# Altium PCB thymio2-main.PcbDoc (part 4 of 4)
Units mm, origin at the board's own origin, x right, y up, seen from the top; angles counter-clockwise.
Board outline 107 x 105.75 mm, 2 copper layers (Top Layer, Bottom Layer), stack 1.591 mm thick; 334 components, 247 nets, 987 pads, 487 vias.
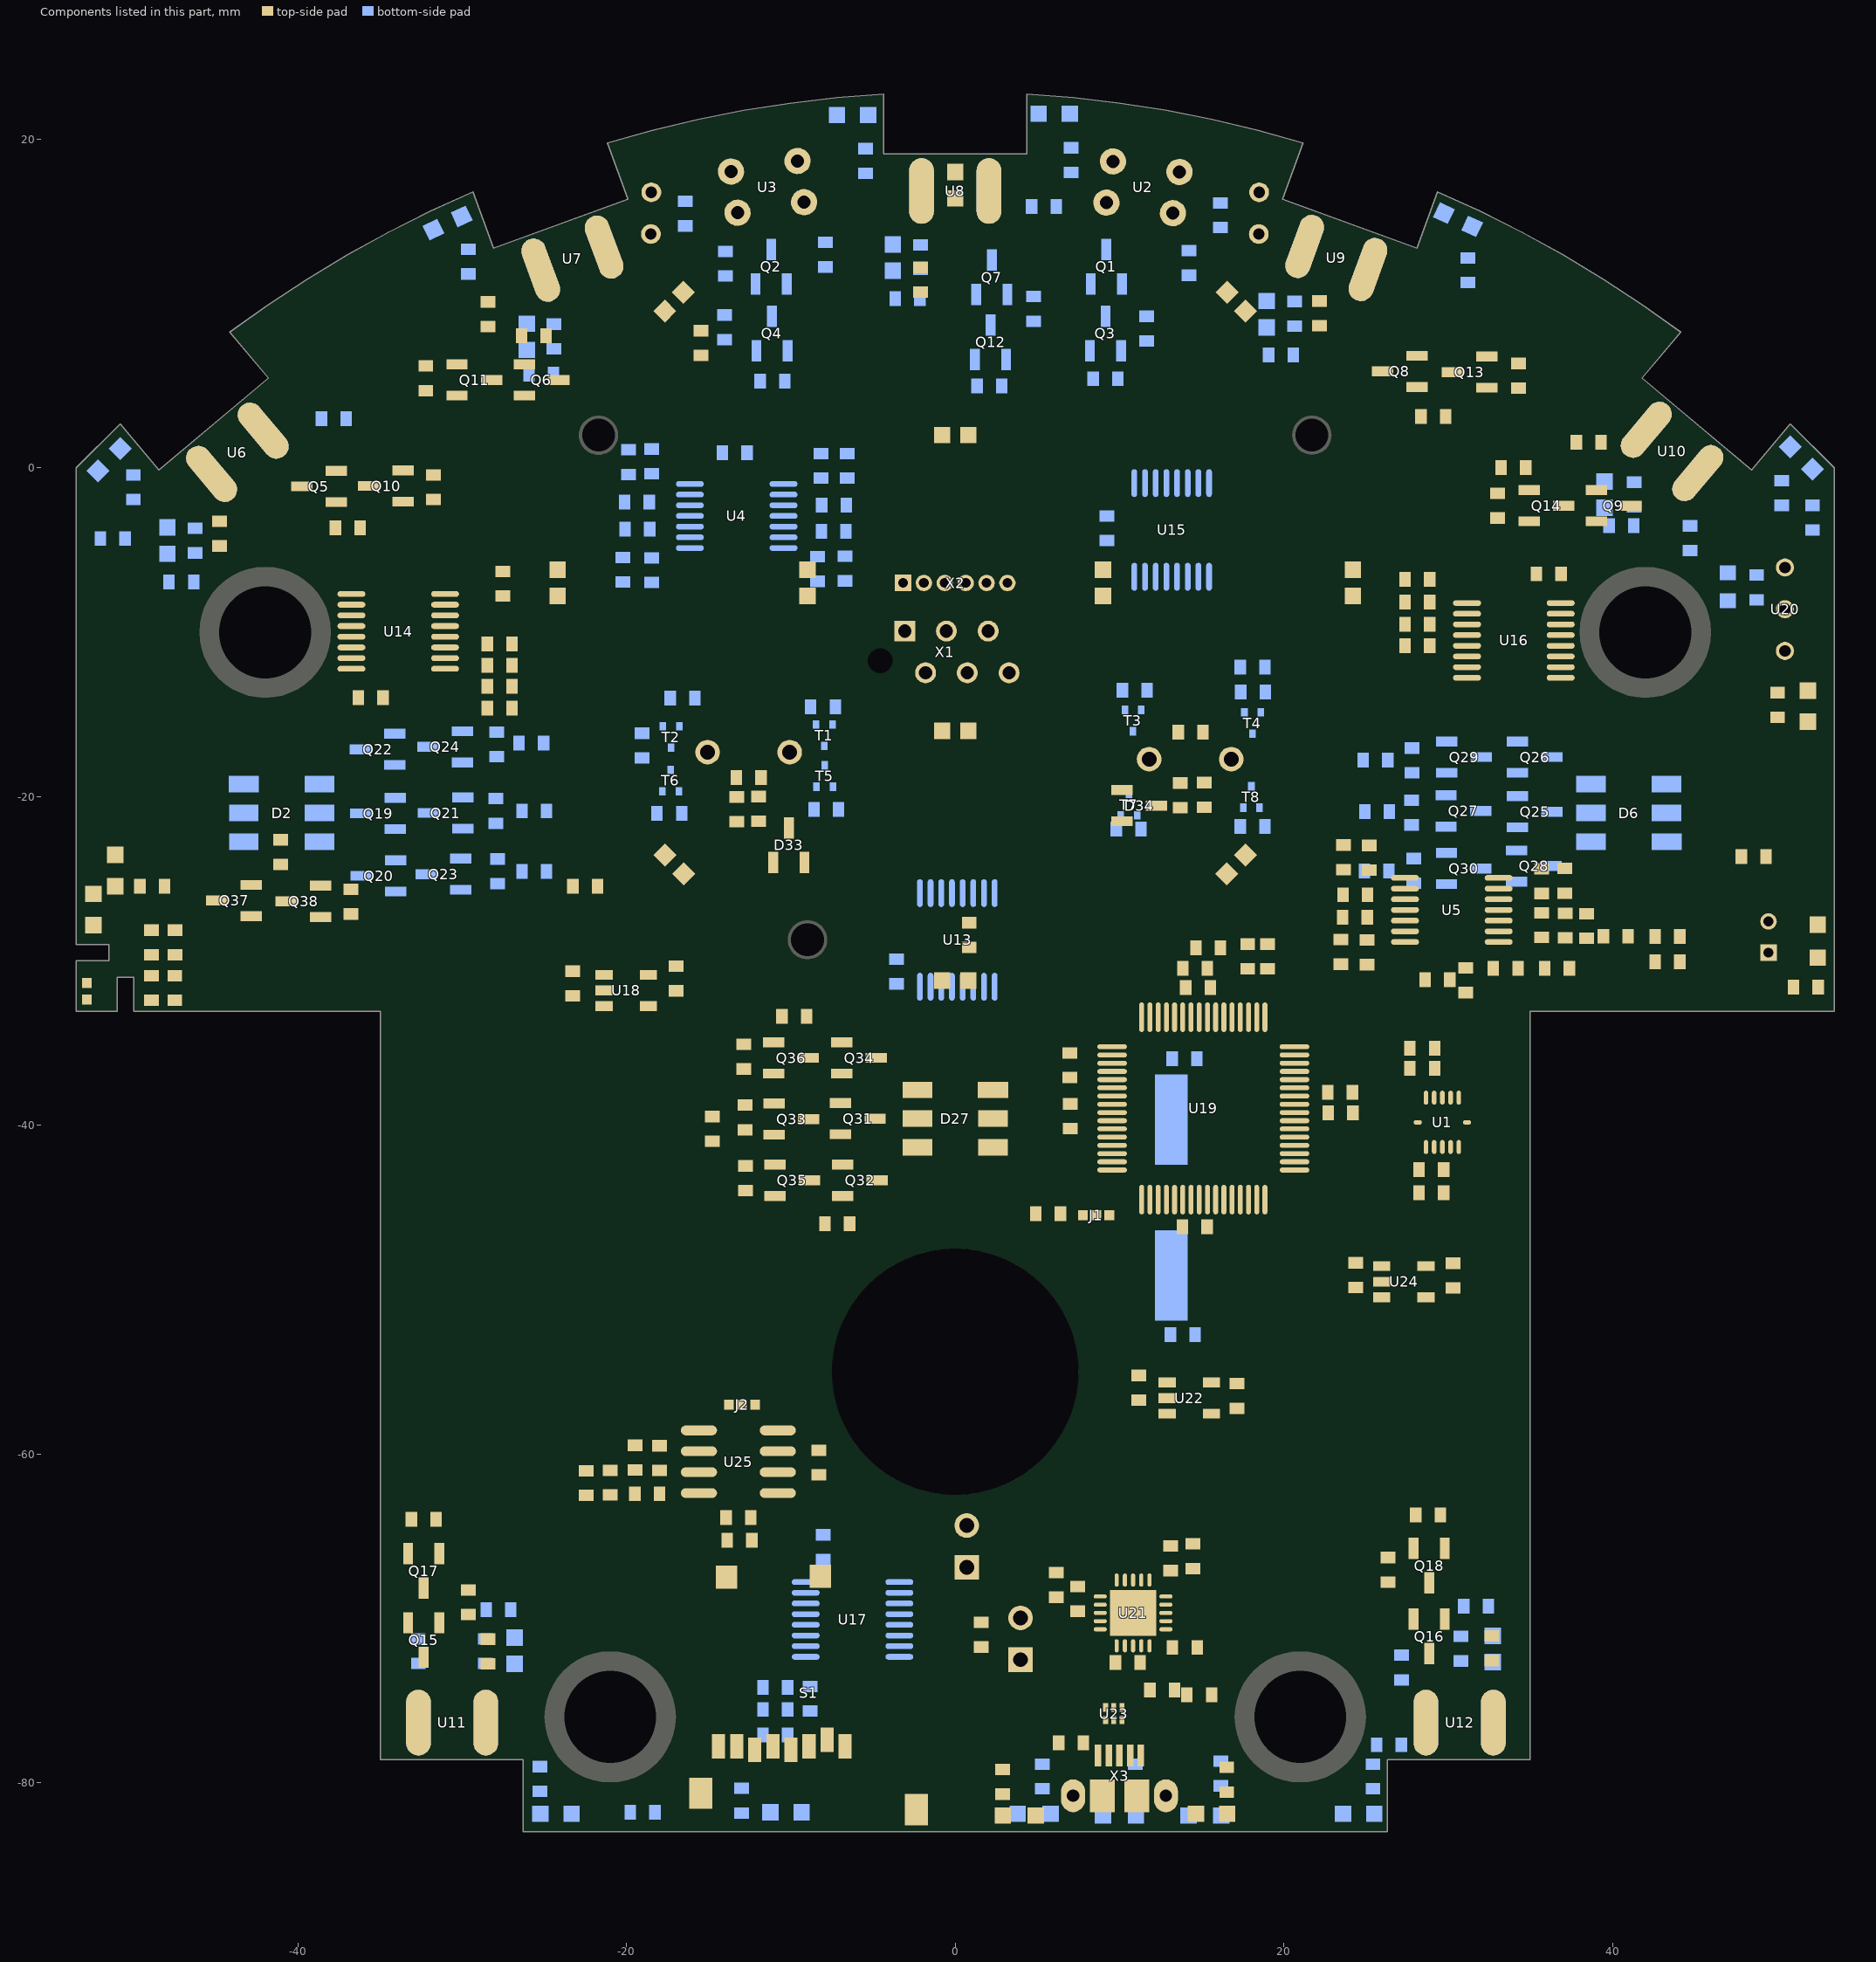
[diagram p4: the components of this part, seen from the top]

## Silkscreen, mask and mechanical layers (free items; w line width, h text height)
Top Solder:
  text ".ProjectName" at -53.375,-38.2 h2.5
  text "EPFL STI-IMT-LSRO1" at -52,-40.9 h1.4
  text "13.02.2008 - Rev 1.0 - DBR" at -54,-42.15 h1.4
Mechanical 1:
  the board outline again, w0.1

## Text inside footprints (layer, text, board x,y; h text height)
BT1: Top Overlay "+" at 4.552,-74.92 h1.15 r90